# Altium PCB PCB1.PcbDoc (part 2 of 2)
Units mm, origin at the board's own origin, x right, y up, seen from the top; angles counter-clockwise.
Board outline 152.4 x 101.6 mm, 4 copper layers (Top Layer, Int1 (GND), Int2 (PWR), Bottom Layer), stack 7.251 mm thick; 107 components, 80 nets, 514 pads, 20 vias.
Unrouted connection lines stored in the file: 263.
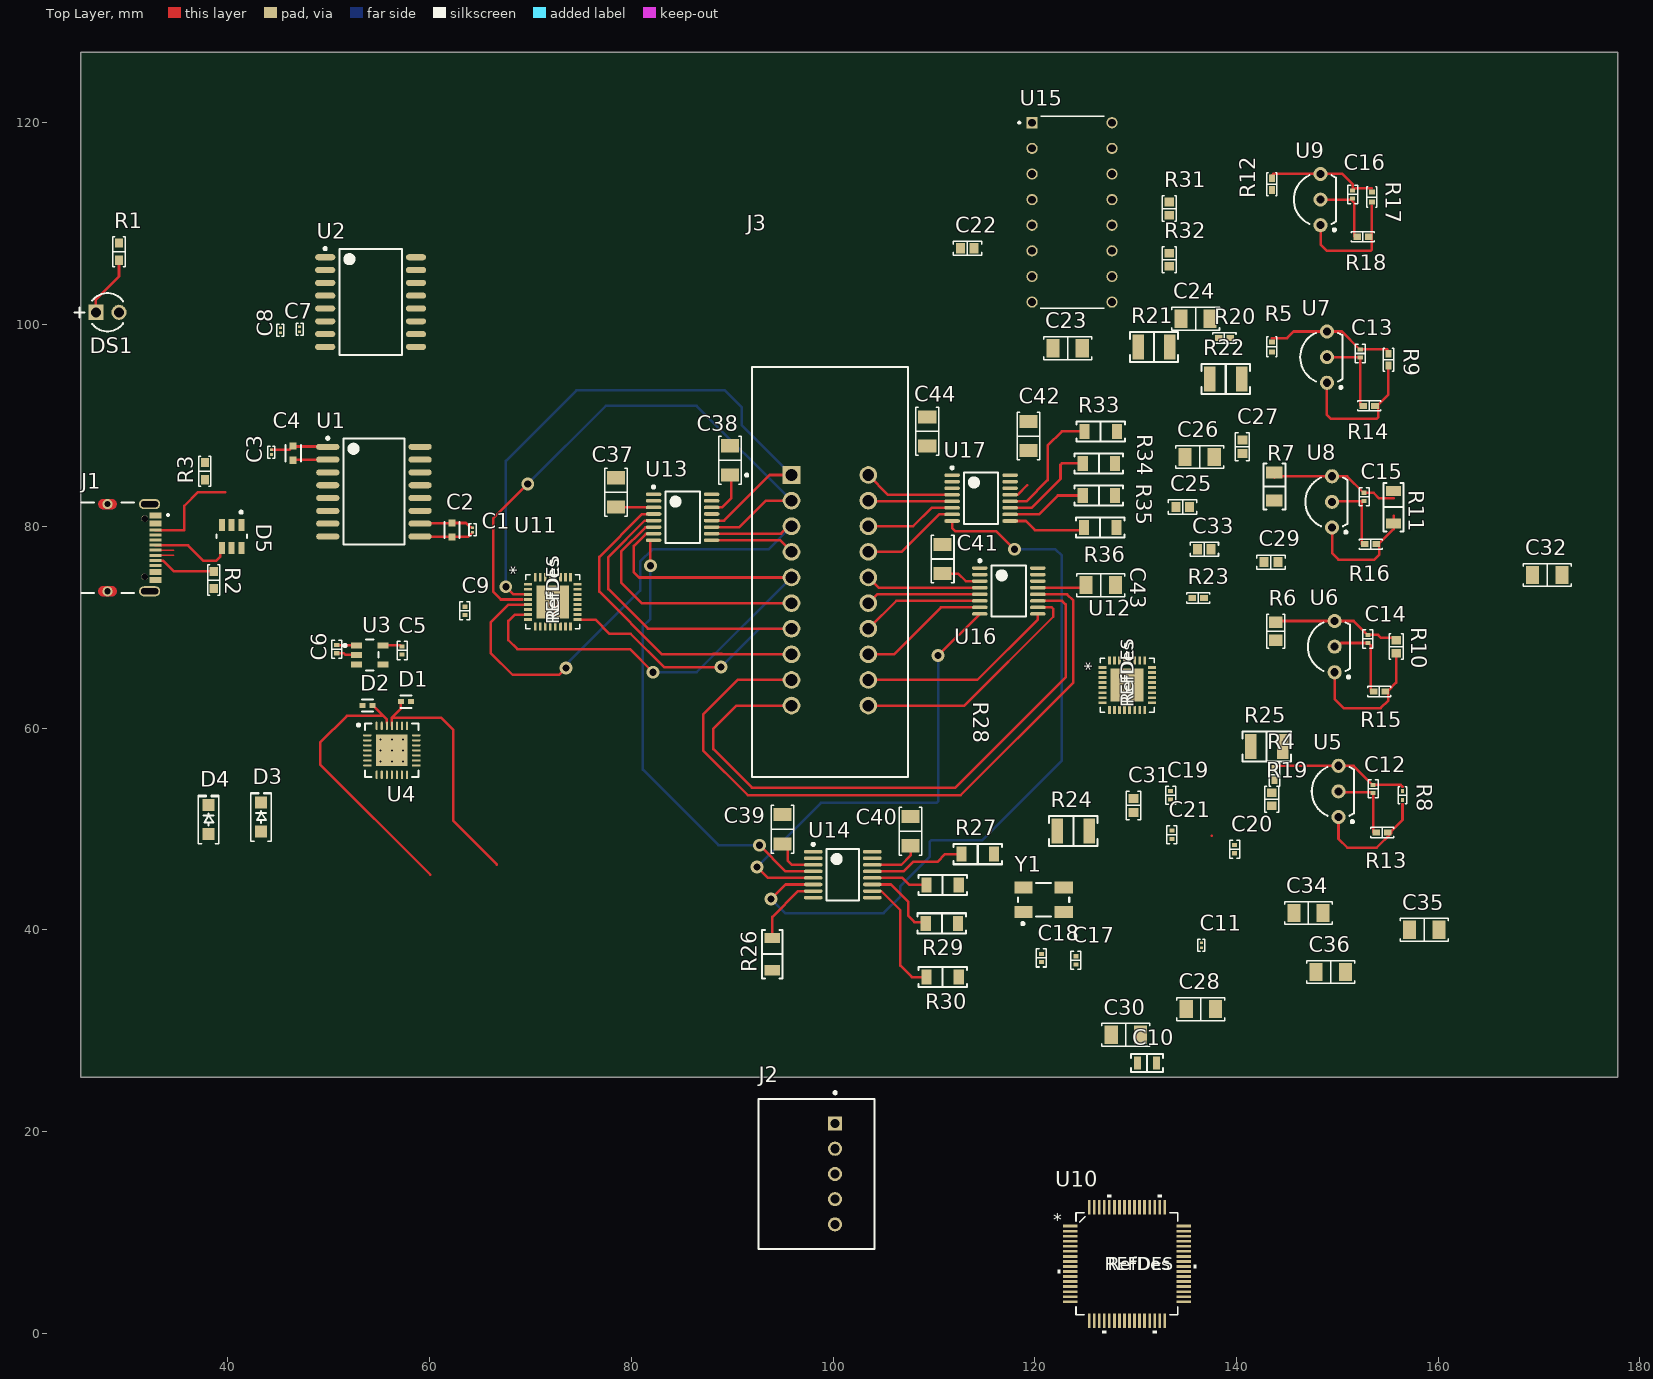
[diagram p0: Top Layer view]

## Via types
v1: diameter 1.27, hole 0.711, Top Layer to Bottom Layer, 11 vias
v2: diameter 0.5, hole 0.2, Top Layer to Bottom Layer, 9 vias

## Nets (pads, with @x,y where several pads share a name; then routed paths per layer and width w, separated by ;. In a path a pad name is that pad's centre, name@x,y a point inside that pad or via, vN(x,y) a via of type N, cw(c..) or ccw(c..) an arc to the next point about the centre after c; other vN are vias at no path point) (continued)
REFN: C1.1 C2.1 C5.1 C6.1 C8.1 C9.1 C10.1 C11.1 C12.1 C13.1 C14.1 C15.1 C16.1 C17.1 C18.1 C19.1 C20.1 C21.1 C22.1 C22.2 C23.1 C23.2 C24.1 C25.1 C26.1 C27.1 C28.1 C28.2 C29.1 C29.2 C30.1 C31.1 C32.1 C33.1 C34.1 C35.1 C36.2 C37.1 C38.1 C39.1 C40.2 C41.1 C42.1 C43.2 C44.2 D1.1 D2.1 D3.1 D4.1 J2.3 R13.1 R14.1 R15.1 R16.1 R18.1 R19.1 R26.1 R27.1 R28.1 R29.1 R30.1 R31.1 R32.1 R33.1 R34.1 R35.1 R36.1 U1.9 U1.13 U1.15 U1.16 U2.9 U2.15 U3.2 U4.3 U4.29 U5.2 U6.2 U7.2 U8.2 U9.2 U10.9 U11.1 U11.28 U11.29 U11.30 U11.32 U11.HTAB U12.1 U12.29 U12.30 U12.32 U12.HTAB U13.14 U14.15 U15.2 U15.4 U15.5 U15.7 U15.8 U15.9 U16.14 U17.14 Y1.2 Y1.4 | length 50.2
  Top Layer w0.254: C6.1 51.515,67.418 51.684,67.249 U3.2 ; U1.9 59.091,78.961 63.815,78.961 C1.1 ; U13.14 88.986,81.874 89.916,82.804 89.916,84.963 C38.1 ; U9.2 151.353,112.395 151.666,112.082 R18.1@151.666,108.712 ; U7.2 148.99,96.755 152.254,96.755 C13.1 152.273,91.962 R14.1@152.287,91.948 ; U8.2 149.533,82.477 C15.1@152.428,82.477 ; U6.2 150.043,68.072 150.405,68.434 C14.1 153.085,68.434 153.303,68.216 R15.1@153.303,63.627 ; U5.2 150.187,53.648 153.47,53.648 C12.1 153.543,49.685 R13.1@153.571,49.657 ; R16.1@152.428,78.232 152.428,82.355 152.55,82.477 C15.1@152.6,82.477
  other v2: 55.161,56.685 56.261,56.685 57.361,56.685 55.161,57.785 56.261,57.785 57.361,57.785 55.161,58.885 56.261,58.885 57.361,58.885
RXD: D1.2 U4.25 U10.37 | length 24.5
  Top Layer w0.254: U4.25 56.261,61.044 ; D1.2 57.15,61.933 56.261,61.044 ; 66.675,46.475 62.357,50.793 62.357,59.817 61.13,61.044 56.261,61.044
S1B: R27.2 U14.13 | length 9.6
  Top Layer w0.254: U14.13 107.005,45.791 107.95,46.736 110.363,46.736 111.125,47.498 R27.2
S2A: U14.5 U16.8 | length 47
  Top Layer w0.254: v1(92.456,46.228) 93.543,45.141 U14.5 ; v1(110.423,67.183) U16.8
  Bottom Layer w0.254: v1(92.456,46.228) 98.806,52.578 110.274,52.578 110.423,52.727 v1(110.423,67.183)
S2B: R28.2 U14.12 | length 5.7
  Top Layer w0.254: U14.12 106.878,45.141 107.569,44.45 R28.2
S3A: U14.6 U17.8 | length 75
  Top Layer w0.254: v1(93.853,43.053) 95.291,44.491 U14.6 ; U17.8 111.806,79.837 112.141,79.502 116.205,79.502 v1(117.983,77.724)
  Bottom Layer w0.254: v1(93.853,43.053) 95.25,41.656 105.029,41.656 106.68,43.307 106.68,44.323 109.601,47.244 109.601,48.746 109.75,48.895 114.808,48.895 122.682,56.769 122.682,77.089 122.047,77.724 v1(117.983,77.724)
S3B: R29.2 U14.11 | length 7.7
  Top Layer w0.254: U14.11 105.75,44.491 107.442,42.799 107.442,41.402 108.077,40.767 109.068,40.767 R29.2
S4A: R26.2 U14.7 | length 7.2
  Top Layer w0.254: R26.2 93.98,41.275 96.546,43.841 U14.7
S4B: R30.2 U14.10 | length 12.1
  Top Layer w0.254: U14.10 103.908,43.823 104.795,43.823 106.68,41.937 106.68,36.449 107.823,35.306 R30.2
S5: R33.2 U17.12 | length 12.3
  Top Layer w0.254: U17.12 119.182,82.479 121.285,84.582 121.285,88.011 122.682,89.408 R33.2
S6: R34.2 U17.11 | length 9.8
  Top Layer w0.254: U17.11 119.675,81.829 122.555,84.709 122.555,86.084 122.704,86.233 R34.2
S7: R35.2 U17.10 | length 8
  Top Layer w0.254: U17.10 120.422,81.179 122.301,83.058 R35.2
S8: R36.2 U17.9 | length 7.8
  Top Layer w0.254: U17.9 119.115,80.529 120.013,79.631 124.64,79.631 R36.2
SCLK: R31.2 U10.30 U15.13
SDIO: R32.2 U10.31 U15.14
TXD: D2.2 U4.26 U10.42 | length 27.1
  Top Layer w0.254: D2.2 54.406,62.23 55.742,60.894 U4.26@55.742,60.508 ; 55.262,61.214 51.816,61.214 49.149,58.547 49.149,56.388 60.071,45.466
USBGND: C3.1 C4.1 C7.1 D5.2 DS1.2 J1.A1_B12 J1.B1_A12 R2.1 R3.1 U1.2 U1.6 U1.7 U1.8 U2.2 U2.8 | length 3.5
  Top Layer w0.254: C4.1 46.514,86.581 49.875,86.581 U1.2
VBUS: C3.2 C4.2 C7.2 D5.5 J1.A4_B9 J1.B4_A9 R1.2 U1.1 U2.1 U2.3 U2.4 U2.5 | length 5.7
  Top Layer w0.254: C3.2 46.13,87.597 46.449,87.916 49.876,87.916 U1.1
VDD: C5.2 C10.2 C11.2 C20.2 C21.2 C26.2 C27.2 C30.2 C31.2 D4.2 J2.1 R20.2 R21.2 R22.2 R23.1 R24.2 R25.2 U3.5 U4.6 U10.8 U11.25 U12.25 U12.28 U13.2 U14.2 U16.2 U17.2 | length 1.9
  Top Layer w0.254: U3.5 57.119,68.199 57.227,68.091 C5.2
VIN1P: U14.8 U15.3
X0: J3.1 U11.3 U13.12 | length 60.5
  Top Layer w0.254: v1(67.564,74.011) 68.32,73.255 69.193,73.255 U11.3 ; U13.12 89.21,80.574 93.726,85.09 J3.1
  Bottom Layer w0.254: v1(67.564,74.011) 67.564,86.487 74.549,93.472 89.281,93.472 90.932,91.821 90.932,90.043 J3.1
X1: J3.2 U11.4 U13.11 | length 57.6
  Top Layer w0.254: 69.193,72.747 67.08,72.747 66.294,73.533 66.294,80.772 v1(69.729,84.207) ; U13.11 90.719,79.924 93.345,82.55 J3.2
  Bottom Layer w0.254: v1(69.729,84.207) 77.47,91.948 86.487,91.948 J3.2
X2: J3.3 U11.5 U13.10 | length 54.4
  Top Layer w0.254: U11.5 69.419,72.255 69.403,72.239 67.818,72.239 66.064,70.485 66.064,67.461 68.247,65.278 72.853,65.278 v1(73.539,65.964) ; U13.10 94.845,79.274 95.581,80.01 J3.3
  Bottom Layer w0.254: v1(73.539,65.964) 73.539,66.239 73.835,66.535 73.835,66.596 80.879,73.64 80.879,76.514 82.089,77.724 93.599,77.724 J3.3
X3: J3.4 U11.6 U13.9 | length 8.4
  Top Layer w0.254: U13.9 94.731,78.624 J3.4
X4: J3.5 U11.7 U13.7 | length 58.3
  Top Layer w0.254: U11.7 68.461,71.255 67.818,70.612 67.818,68.707 68.707,67.818 79.883,67.818 v1(82.169,65.532) ; U13.7 82.197,79.256 81.46,79.256 80.264,78.059 80.264,75.438 80.772,74.93 J3.5
  Bottom Layer w0.254: v1(82.169,65.532) 86.487,65.532 J3.5
X5: J3.6 U11.8 U13.6 | length 25
  Top Layer w0.254: U13.6 82.197,79.906 81.392,79.906 78.994,77.508 78.994,74.422 81.026,72.39 J3.6
X6: J3.7 U11.17 U13.5 | length 53.7
  Top Layer w0.254: U11.17 76.438,70.755 77.851,69.342 79.947,69.342 83.249,66.04 v1(88.9,66.04) ; U13.5 82.197,80.556 81.323,80.556 77.724,76.956 77.724,73.787 81.661,69.85 J3.7
  Bottom Layer w0.254: v1(88.9,66.04) 92.71,69.85 J3.7
X7: J3.8 U11.18 U13.4 | length 32.2
  Top Layer w0.254: U13.4 82.197,81.206 81.079,81.206 76.835,76.962 76.835,73.533 83.058,67.31 88.098,67.31 88.131,67.343 88.973,67.343 89.006,67.31 J3.8
X8: J3.9 U11.19 U16.12 | length 68.8
  Top Layer w0.254: J3.9 90.551,64.77 87.122,61.341 87.122,57.785 91.567,53.34 112.649,53.34 123.825,64.516 123.825,72.644 123.205,73.264 U16.12
X9: J3.10 U11.20 U16.11 | length 61.9
  Top Layer w0.254: J3.10 90.424,62.23 88.138,59.944 88.138,57.912 91.948,54.102 112.141,54.102 123.063,65.024 123.063,72.263 122.712,72.614 U16.11
pads on no net: C42.2 D5.1 D5.6 J1. J1.A8 J1.B8 J1.SH1 J1.SH2 J1.SH3 J1.SH4 R5.2 U1.3 U1.4 U1.5 U1.11 U1.12 U1.14 U4.1 U4.2 U4.9 U4.10 U4.11 U4.12 U4.13 U4.14 U4.15 U4.16 U4.17 U4.18 U4.19 U4.20 U4.21 U4.22 U4.23 U4.24 U4.27 U4.28 U10.1 U10.2 U10.3 U10.4 U10.5 U10.6 U10.7 U10.13 U10.14 U10.15 U10.16 U10.17 U10.23 U10.24 U10.25 U10.26 U10.27 U10.28 U10.29 U10.32 U10.33 U10.34 U10.35 U10.38 U10.39 U10.40 U10.41 U10.43 U10.44 U10.47 U10.48 U10.49 U10.50 U10.51 U10.52 U10.53 U10.54 U10.55 U10.56 U10.57 U10.58 U10.59 U10.62 U10.63 U10.64 U11.2 U11.16 U11.21 U11.22 U11.23 U12.2 U12.16 U12.21 U12.22 U12.23 U14.9 U15.6 U15.12 U17.3
copper on no net: | length 0
  Top Layer w0.254: 137.545,49.315 137.563,49.334

## Polygon pours and split planes (outlines as drawn)
no net on Int1 (GND) (split plane): 177.29,25.91 25.91,25.91 25.91,126.49 177.29,126.49
no net on Int2 (PWR) (split plane): 177.29,25.91 25.91,25.91 25.91,126.49 177.29,126.49

## Text inside footprints (layer, text, board x,y; h text height)
J1: Mechanical 13 "PCB EDGE" at 25.57,72.482 h0.41 r270
U10: Top Overlay "REFDES" at 126.925,6.236 h1.27; Top Overlay "RefDes" at 127.242,6.236 h1.27; Top Overlay "*" at 121.832,10.617 h1.27; Mechanical 13 "RefDes2" at 126.925,6.236 h1.27; Mechanical 13 "*" at 121.832,10.617 h1.27
U11: Top Overlay "*" at 69.215,75.184 h1.27 r90; Top Overlay "RefDes" at 72.859,70.6 h1.27 r90; Top Overlay "REFDES" at 72.859,70.283 h1.27 r90; Mechanical 13 "*" at 70.241,74.096 h0.64 r90; Mechanical 13 "RefDes2" at 72.859,70.283 h1.27 r90
U12: Top Overlay "REFDES" at 129.794,62.039 h1.27 r90; Top Overlay "RefDes" at 129.794,62.357 h1.27 r90; Top Overlay "*" at 126.199,65.694 h1.27 r90; Mechanical 13 "RefDes2" at 129.794,62.039 h1.27 r90; Mechanical 13 "*" at 127.176,65.853 h0.64 r90